# Altium PCB PCB.PcbDoc
Units mm, origin at the board's own origin, x right, y up, seen from the top; angles counter-clockwise.
Board outline 44.96 x 32.77 mm, 4 copper layers (Top Layer, Mid Layer 1, Mid Layer 2, Bottom Layer), stack 1.57 mm thick; 21 components, 14 nets, 70 pads, 19 vias.
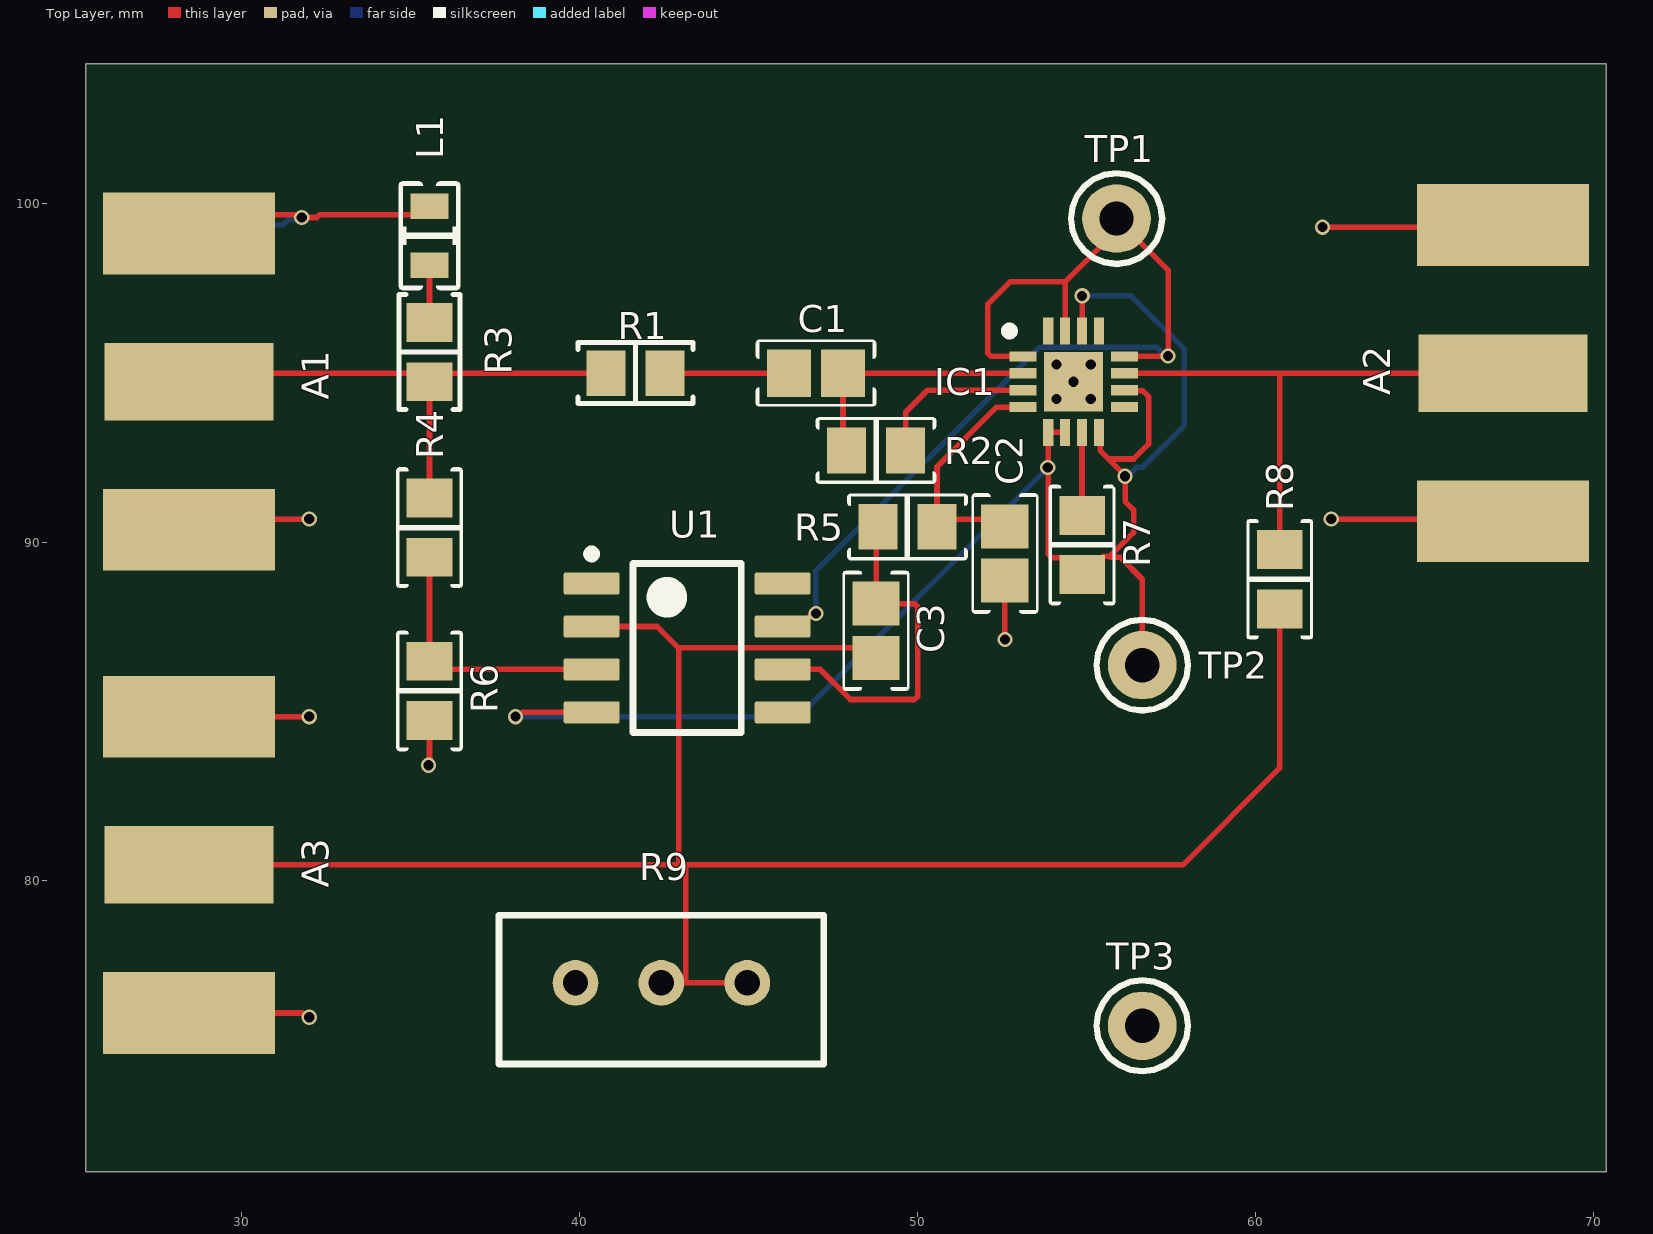
[diagram p0: Top Layer view]
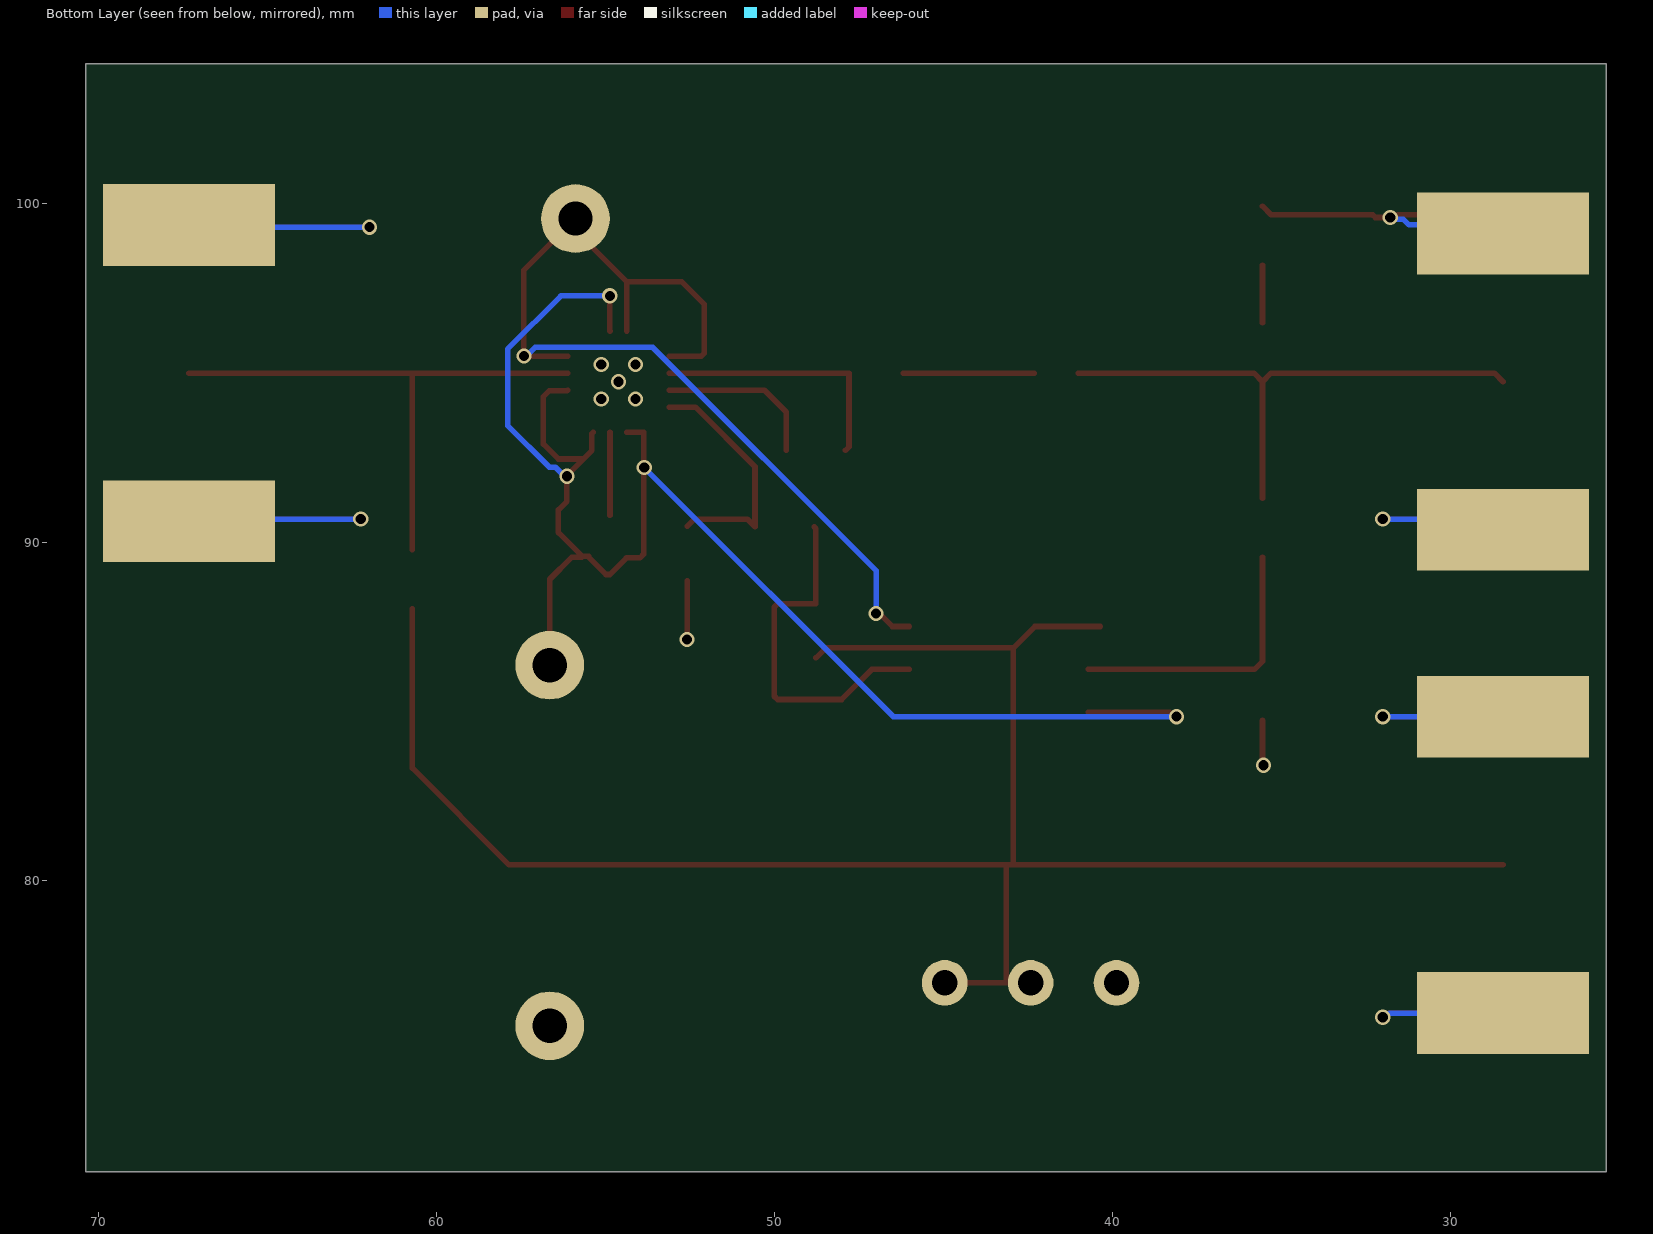
[diagram p1: Bottom Layer view, seen from below]
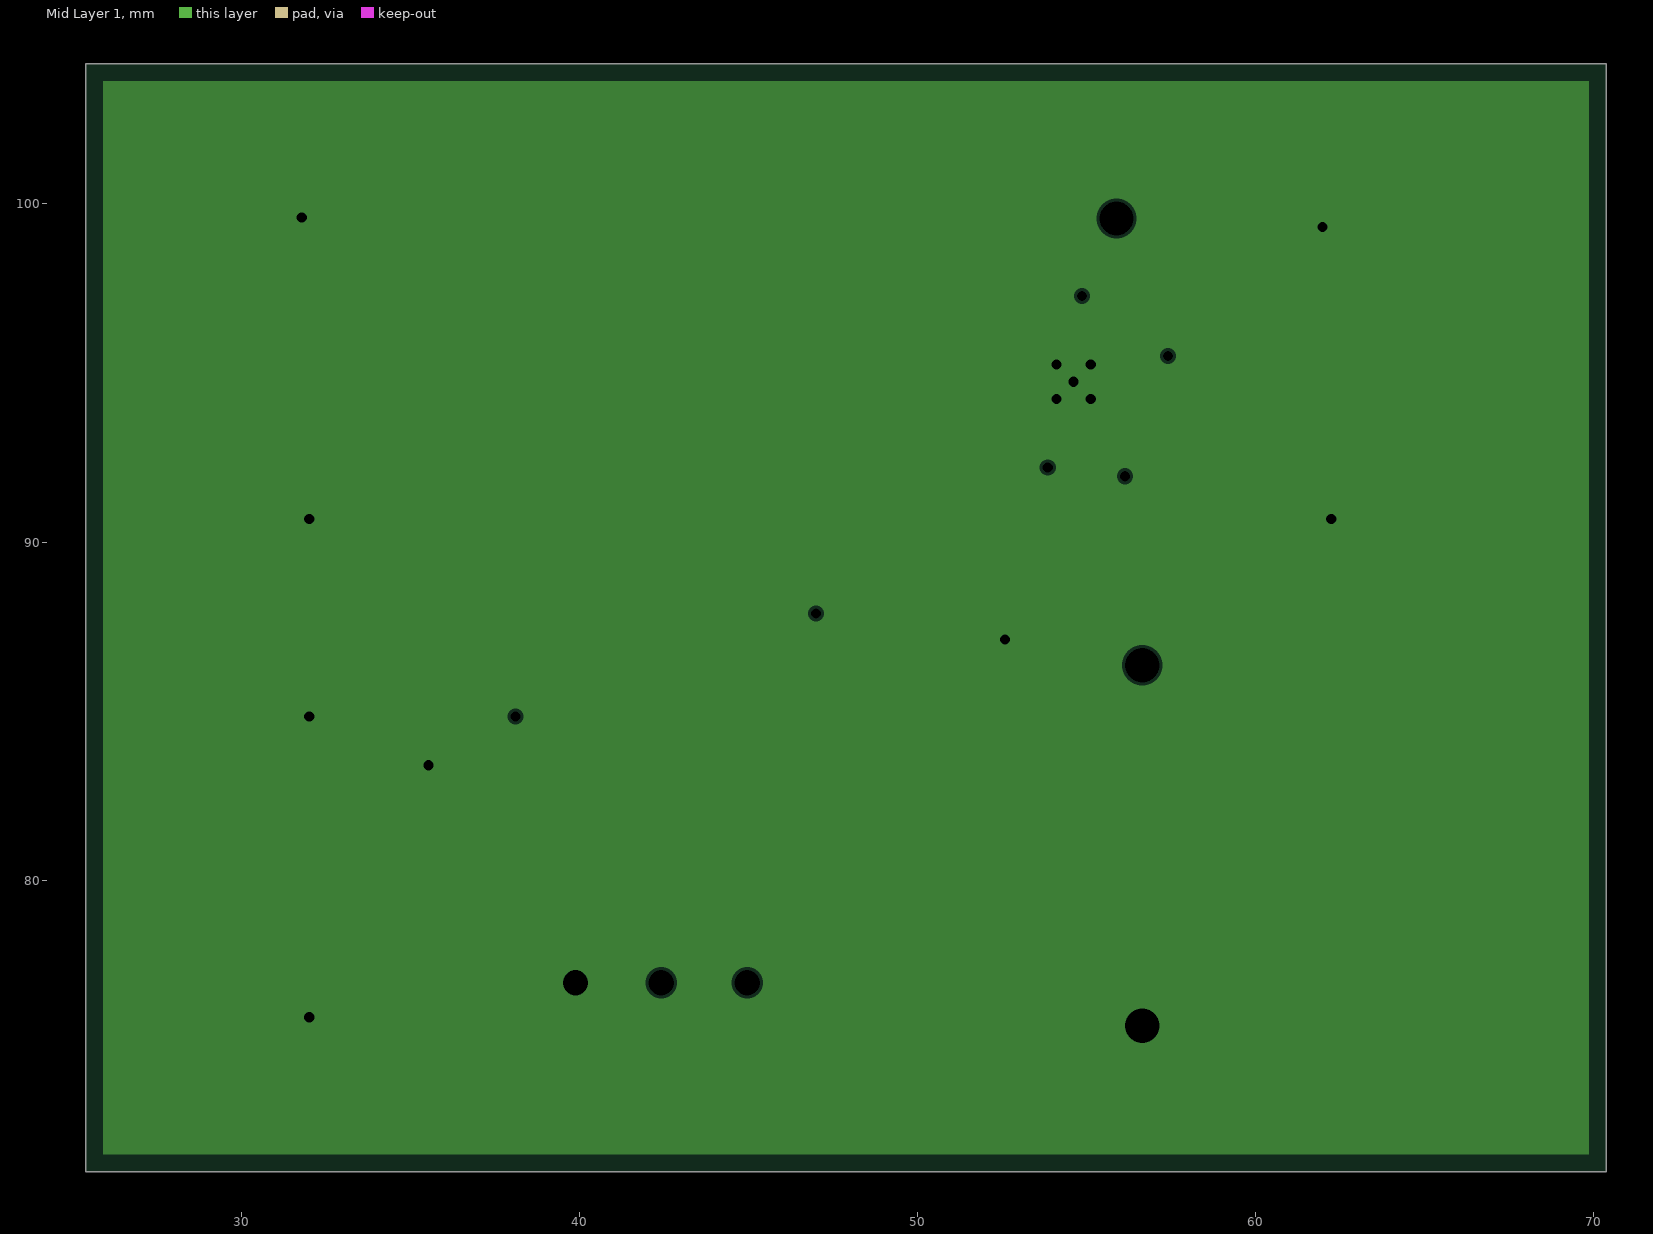
[diagram p2: Mid Layer 1, clearances drawn from the general rule]
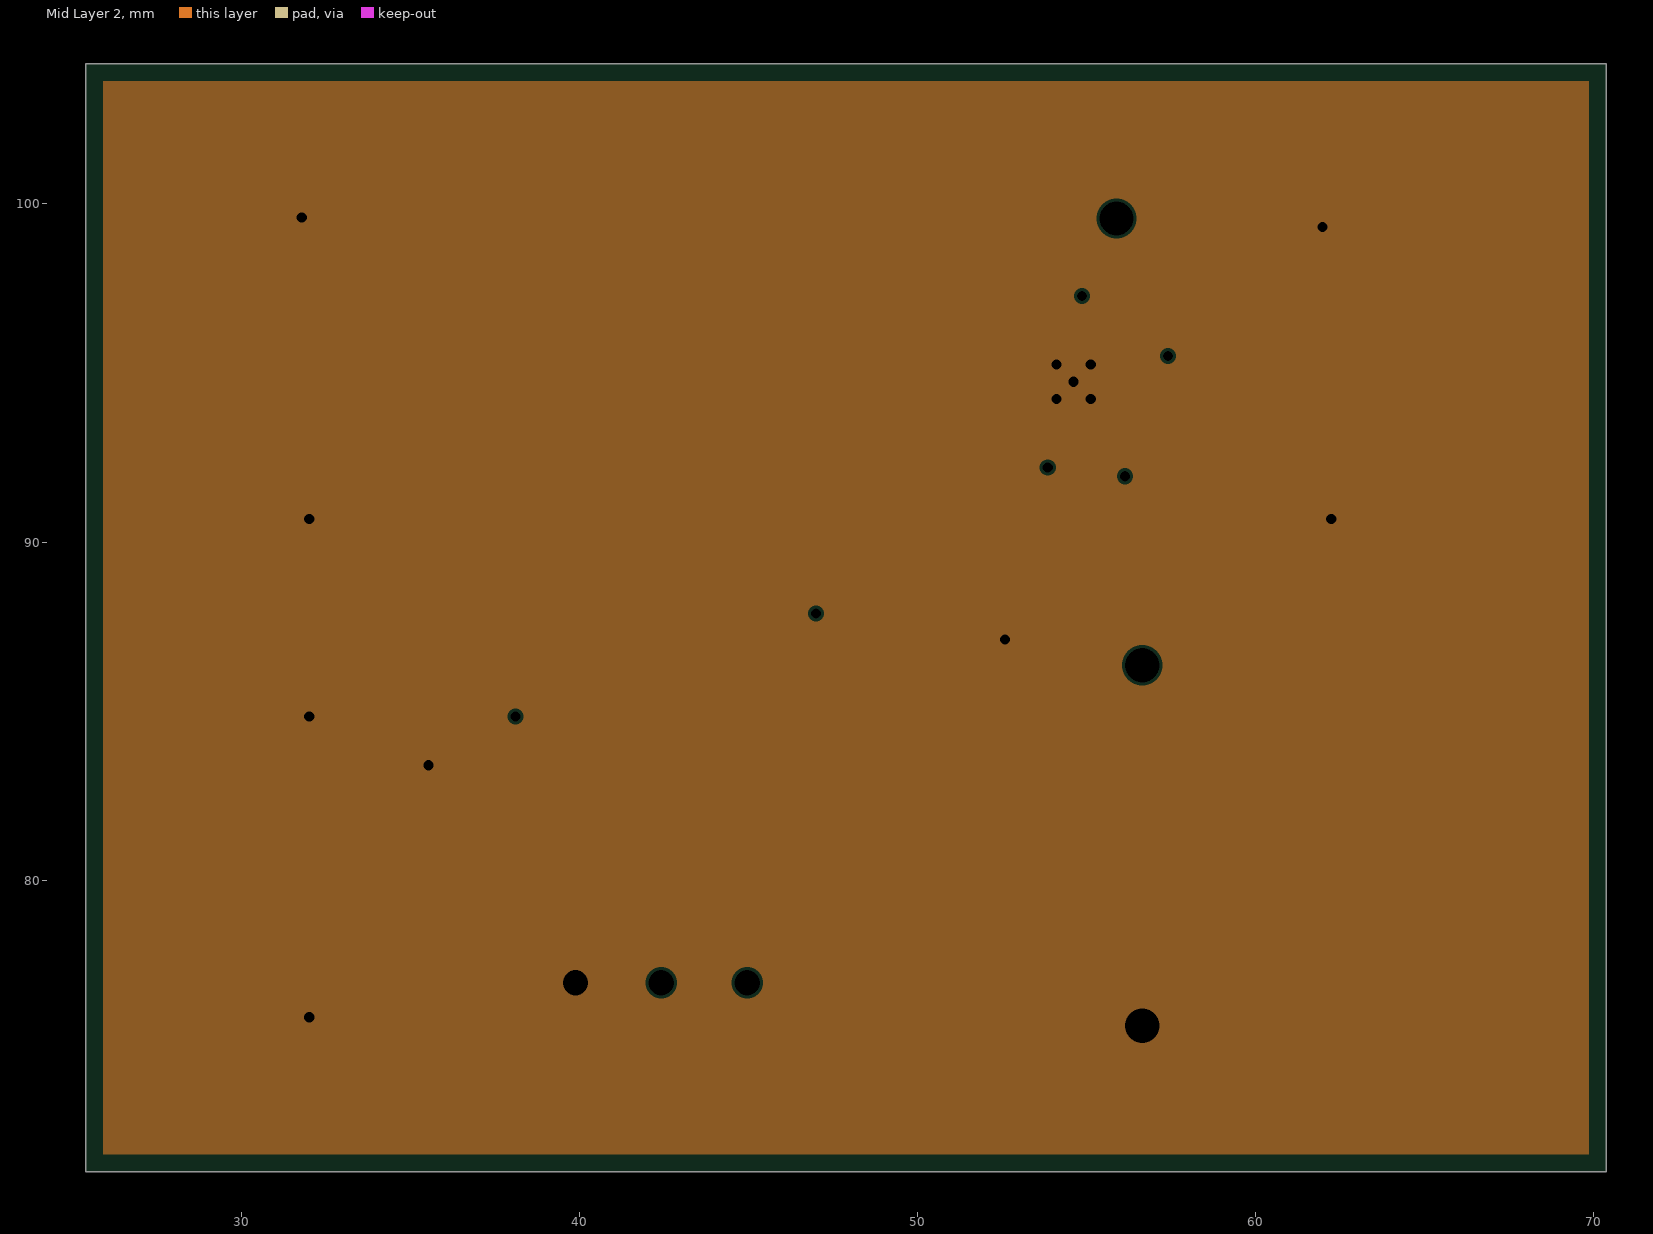
[diagram p3: Mid Layer 2, clearances drawn from the general rule]
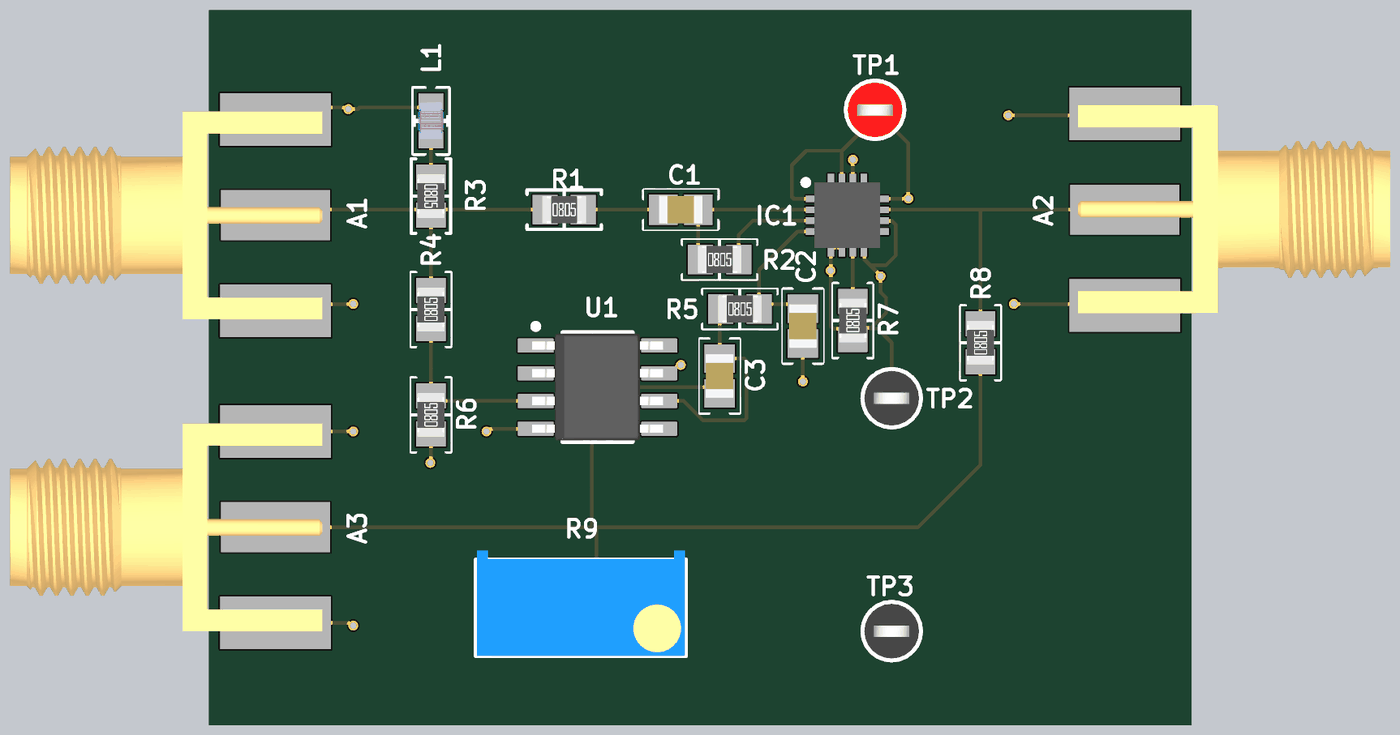
[diagram p4: 3D render of the assembled board from above, using the file's embedded part models]

## Layer stack, top to bottom
Top Solder: solder mask 0.0127, Solder Resist, Dk 3.8
Top Layer: signal copper 0.035
Dielectric 1: prepreg 0.1, 2313, Dk 4.05
Mid Layer 1: plane copper 0.0175, net GND
Core: core 1.265, FR-4, Dk 4.5
Mid Layer 2: plane copper 0.0175, net GND
Dielectric 2: prepreg 0.1, 2313, Dk 4.05
Bottom Layer: signal copper 0.035
Bottom Solder: solder mask 0.0127, Solder Resist, Dk 3.8

## Board outline
25.4,71.374 70.358,71.374 70.358,104.14 25.4,104.14

## Design rules (kind name [scope] priority, off if disabled: settings)
BoardOutlineClearance [All] p1: gap=0.2 ignorepadtopadclearanceinfootprint=FALSE
Clearance [All] p1: gap=0.089 ignorepadtopadclearanceinfootprint=FALSE except(0.127: Arc-Via Track-Via SMDPad-Via THPad-Via Via-Via Via-Fill Via-Poly Via-Region Via-Text; 0.25: Arc-Hole Track-Hole SMDPad-Hole THPad-Hole Via-Hole Fill-Hole Poly-Hole Region-Hole Text-Hole)
ComponentClearance [All] p1: gap=0.089 collisioncheckmode=3 verticalgap=0.089 showdistances=TRUE
DiffPairsRouting [All] p1: maxlimit=0.089 minlimit=0.089 mostfreqgap=0.089 toplayer_minwidth=0.089 toplayer_maxwidth=1816.048 toplayer_prefwidth=0.089 bottomlayer_minwidth=0.089 bottomlayer_maxwidth=1816.048 bottomlayer_prefwidth=0.089 maxuncoupledlength=12.7
Height [All] p1: minheight=0 maxheight=1816.048 prefheight=12.7
HoleSize [All] p1: absolutevalues=TRUE maxlimit=6.3 minlimit=0.2 maxpercent=80.000 minpercent=20.000
HoleToHoleClearance [All] p1: gap=0.25 allowstackedmicrovias=FALSE
MinimumAnnularRing [All] p1: minimumring=0.074
MinimumSolderMaskSliver [All] p1: minsoldermaskwidth=0
PlaneClearance [All] p1: clearance=0.089
PlaneConnect PlaneConnectPowerPads [InPadClass('PowerPads')] p1: planeconnectstyle=Direct reliefexpansion=0.508 reliefentries=4 reliefconductorwidth=0.254 reliefairgap=0.254
PlaneConnect [All] p2: pad.planeconnectstyle=Relief pad.reliefexpansion=0.3 pad.reliefentries=4 pad.reliefconductorwidth=0.089 pad.reliefairgap=0.089 via.planeconnectstyle=Direct via.reliefexpansion=0.3 via.reliefentries=4 via.reliefconductorwidth=0.127 via.reliefairgap=0.127
PolygonConnect PolygonConnectPowerPads [All vs (InPadClass('PowerPads'))] p1: connectstyle=Direct reliefconductorwidth=0.254 reliefentries=4 polygonreliefangle="90 Angle" airgapwidth=0.254
PolygonConnect [All] p2: thpad.connectstyle=Relief thpad.reliefconductorwidth=0.089 thpad.reliefentries=4 thpad.polygonreliefangle="90 Angle" thpad.airgapwidth=0.089 smdpad.connectstyle=Relief smdpad.reliefconductorwidth=0.089 smdpad.reliefentries=4 smdpad.polygonreliefangle="90 Angle" smdpad.airgapwidth=0.089 via.connectstyle=Direct via.reliefconductorwidth=0.127 via.reliefentries=4 via.polygonreliefangle="90 Angle" via.airgapwidth=0.127
RoutingVias [All] p1: holewidth=0.2 width=0.45 viastyle="Through Hole" minholewidth=0.2 minwidth=0.45 maxholewidth=6.3 maxwidth=6.55
SilkToSilkClearance [All] p1: silktosilkclearance=0
SilkToSolderMaskClearance [IsPad] p1: minsilkscreentomaskgap=0.089 clearancetoexposedcopper=TRUE
SolderMaskExpansion [All] p1: expansion=0.075 istentingtop=FALSE
Width [All] p1: maxlimit=1816.048 minlimit=0.089 preferedwidth=0.089
20 further rules are at their usual default settings.

## Components (designator, comment, footprint, x,y, rotation, side; value= is the part's Value field where it differs from the comment)
A1 "0732511150" "MOLEX SD-73251-115" 25.448,94.742 r180 top
A2 "0732511150" "MOLEX SD-73251-115" 70.31,94.996 r0 top
A3 "0732511150" "MOLEX SD-73251-115" 25.448,80.453 r180 top
C1 "330 pF" "CAP 0805_2012" 46.99,94.996 r0 top
C2 "100 pF" "CAP 0805_2012" 52.578,89.662 r90 top
C3 "56 pF" "CAP 0805_2012" 48.768,87.376 r90 top
IC1 "BUF802IRGTR" QFN50P300X300X100-17N-D 54.61,94.742 r0 top
L1 "6.8nH" "IND 0603_1608 RF WW" 35.56,99.06 r270 top
R1 "30 Ohms" "RES 0805_2012" 41.656,94.996 r0 top
R2 "10 MOhms" "RES 0805_2012" 48.768,92.71 r0 top
R3 "51 Ohms" "RES 0805_2012" 35.56,95.617 r270 top
R4 "825 kOhms" "RES 0805_2012" 35.56,90.424 r90 top
R5 "2 kOhms" "RES 0805_2012" 49.696,90.449 r0 top
R6 "200 kOhms" "RES 0805_2012" 35.56,85.598 r90 top
R7 "17.8 kOhms" "RES 0805_2012" 54.864,89.916 r90 top
R8 "80.6 kOhms" "RES 0805_2012" 60.706,88.9 r90 top
R9 "250 kOhms" "BOURNS TRIMPOT 3296W" 42.418,76.962 r0 top
TP1 "5000" Keystone5000 55.88,99.568 r90 top
TP2 "5001" Keystone5001 56.642,86.36 r90 top
TP3 "5001" Keystone5001 56.642,75.692 r90 top
U1 "OPA140AID" D0008A_M 43.18,86.868 r0 top

## Footprints (in the part's own frame and the unit in brackets; to place one, negate y for a bottom-side part, rotate by r counter-clockwise, add the part's x,y. Pads: shape width x height; smd on the part's side, far side on the other; paste and mask are expansions set on the pad)
"BOURNS TRIMPOT 3296W" [mm] "3296 - 3/8 ? Square Trimpot® Trimming Potentiometer"
  round 1.35 hole 0.75: 1(-2.54,0) 2(0,0) 3(2.54,0)
  silkscreen extent -4.8,-2.4 4.8,2, body extent -4.76,-2.41 4.76,2.41, height 11.56
"CAP 0805_2012" [mm] "Chip Capacitor, 2-Leads, Body 2.00x1.20mm, IPC Medium Density"
  rect 1.3x1.4 smd: 1(-0.8,0) 2(0.8,0)
  silkscreen extent -1.78,-0.98 1.78,0.98, body extent -1,-0.64 1,0.64, height 1.26
D0008A_M [mm] "SOIC, 8-Leads, Body 5x4mm, Pitch 1.27mm, IPC Low Density"
  rrect15% 1.65x0.65 smd: 1(-2.825,1.905) 2(-2.825,0.635) 3(-2.825,-0.635) 4(-2.825,-1.905) 5(2.825,-1.905) 6(2.825,-0.635) 7(2.825,0.635) 8(2.825,1.905)
  silkscreen extent -2.95,-2.5 1.6,2.9, body extent -3,-2.45 3,2.45, height 1.63
"IND 0603_1608 RF WW" [mm] "Chip Inductor, 2-Leads, Body 1.65x0.99mm, IPC Medium Density"
  rect 0.76x1.13 smd: 1(-0.875,0) 2(0.875,0)
  silkscreen extent -1.61,-0.91 1.61,0.91, body extent -0.84,-0.58 0.83,0.58, height 1
Keystone5000 [mil]
  round 80 hole 40: 1(0,0)
  silkscreen extent -56,-56 56,56, body extent -49,-49 49,49, height 182
Keystone5001 [mil]
  round 80 hole 40: 1(0,0)
  silkscreen extent -56,-56 56,56, body extent -49,-49 49,49, height 182
"MOLEX SD-73251-115" [mm]
  rect 5.08x2.415 smd: G(-3,4.383) G(-3,-4.383)
  rect 5.08x2.415 smd far side: G(-3,4.383) G(-3,-4.383)
  rect 5x2.29 smd: S(-3,0)
  body extent -5.14,-4.75 9.14,4.78, height 4.36
QFN50P300X300X100-17N-D [mm]
  rect 0.8x0.3 smd: 1(-1.5,0.75) 2(-1.5,0.25) 3(-1.5,-0.25) 4(-1.5,-0.75) 9(1.5,-0.75) 10(1.5,-0.25) 11(1.5,0.25) 12(1.5,0.75)
  rect 0.3x0.8 smd: 5(-0.75,-1.5) 6(-0.25,-1.5) 7(0.25,-1.5) 8(0.75,-1.5) 13(0.75,1.5) 14(0.25,1.5) 15(-0.25,1.5) 16(-0.75,1.5)
  rect 1.75x1.75 smd: 17(0,0)
  silkscreen extent -2.02,1.38 -1.77,1.62, body extent -1.5,-1.5 1.5,1.5, height 1
"RES 0805_2012" [mm] "Chip Resistor, 2-Leads, Body 2.00x1.25mm, IPC Medium Density"
  rect 1.15x1.35 smd: 1(-0.875,0) 2(0.875,0)
  silkscreen extent -1.7,-0.9 1.7,0.9, body extent -1,-0.62 1,0.63, height 0.6

## Part data
A1 A2 A3: "CONN SMA RCPT STR 50OHM EDGE MNT", Frequency - Max="18 GHz", Housing Color=Gold, manufacturer=Molex, Supplier Part Number 1=WM5534-ND, componentlink1description=Datasheet, componentlink1url=https://www.molex.com/pdm_docs/ps/PS-89675-346.pdf, componentlink2description="DigiKey Link", componentlink2url=https://www.digikey.com/en/products/detail/molex/0732511150/1465156, Connector Style=SMA, Connector Type="Receptacle, Female Socket", Contact Termination=Solder, Fastening Type=Threaded, Impedance=50Ohm, lastupdated="29-6-2022 18:06:18", Lifecycle Status=Active, Minimum Order=1, Mounting Type="Board Edge, End Launch", Number of Ports=1, packaging=Tray, Part Number=0732511150, Part Status=Active, price=2.16, series=73251, Shield Termination=Solder, Supplier 1=DigiKey
C1: library part 0805N331K501NT, "CAP CER 330PF 500V C0G/NP0 0805", Device Package="0805 (2012 Metric)", manufacturer="Knowles Novacap", Operating Temperature="-55°C ~ 125°C", Supplier Part Number 1=1763-1199-1-ND, Temperature Coefficient="C0G, NP0", Tolerance=±10%, Voltage - Rated=500V, Applications="General Purpose", Capacitance="330 pF", componentlink1description=Datasheet, componentlink1url=https://www.knowlescapacitors.com/getattachment/f044c413-e6db-482e-8245-bb630384b177/Hi-Rel-C0G.aspx, componentlink2description="DigiKey Link", componentlink2url=https://www.digikey.com/en/products/detail/knowles-novacap/0805N331K501NT/7246439, lastupdated="28-4-2023 19:11:32", Lifecycle Status=Active, Minimum Order=1, Mounting Type="Surface Mount, MLCC", Package / Case="0805 (2012 Metric)", packaging=TapeAndReel, Part Number=0805N331K501NT, Part Status=Active, partid=14472, price=0.09, series=-, Size / Dimension="0.080\" L x 0.050\" W (2.03mm x 1.27mm)", Supplier 1=DigiKey, Thickness (Max)="0.054\" (1.37mm)"
C2: library part 501R15N101KV4T, "CAP CER 100PF 500V C0G/NP0 0805", Device Package="0805 (2012 Metric)", manufacturer="Johanson Dielectrics Inc.", Operating Temperature="-55°C ~ 125°C", Supplier Part Number 1=709-1019-1-ND, Temperature Coefficient="C0G, NP0", Tolerance=±10%, Voltage - Rated=500V, Applications="General Purpose", Capacitance="100 pF", componentlink1description=Datasheet, componentlink1url=//media.digikey.com/pdf/Data%20Sheets/Johanson%20Dielectrics/High_Voltage_MLCC.pdf, componentlink2description="DigiKey Link", componentlink2url=https://www.digikey.com/en/products/detail/johanson-dielectrics-inc/501R15N101KV4T/1556341, Features="High Voltage", lastupdated="28-4-2023 19:11:22", Lifecycle Status=Active, Minimum Order=1, Mounting Type="Surface Mount, MLCC", Package / Case="0805 (2012 Metric)", packaging=TapeAndReel, Part Number=501R15N101KV4T, Part Status=Active, partid=17109, price=0.03, series=-, Size / Dimension="0.080\" L x 0.050\" W (2.03mm x 1.27mm)", Supplier 1=DigiKey, Thickness (Max)="0.055\" (1.40mm)"
C3: library part 251R15S560GV4E, "CAP CER 56PF 250V NP0 0805", Device Package="0805 (2012 Metric)", manufacturer="Johanson Technology Inc.", Operating Temperature="-55°C ~ 125°C", Supplier Part Number 1=712-1747-1-ND, Temperature Coefficient="C0G, NP0", Tolerance=±2%, Voltage - Rated=250V, Applications="RF, Microwave, High Frequency", Capacitance="56 pF", componentlink1description=Datasheet, componentlink1url=https://www.johansontechnology.com/downloads/catalog/johanson-technology-multi-layer-high-q-capacitors.pdf, componentlink2description="DigiKey Link", componentlink2url=https://www.digikey.com/en/products/detail/johanson-technology-inc/251R15S560GV4E/1919542, Features="High Q, Low Loss, Ultra Low ESR", lastupdated="28-4-2023 19:11:18", Lifecycle Status=Active, Minimum Order=1, Mounting Type="Surface Mount, MLCC", Package / Case="0805 (2012 Metric)", packaging=TapeAndReel, Part Number=251R15S560GV4E, Part Status=Active, partid=18415, price=0.15, series=S, Size / Dimension="0.080\" L x 0.050\" W (2.03mm x 1.27mm)", Supplier 1=DigiKey, Thickness (Max)="0.046\" (1.17mm)"
IC1: "Integrated Circuit", Manufacturer_Name="Texas Instruments", Mouser Part Number=595-BUF802IRGTR, Datasheet Link=https://www.ti.com/lit/ds/symlink/buf802.pdf?ts=1646208046294&ref_url=https%253A%252F%252Fwww.ti.com%252Fstore%252Fti%252Fen%252Fp%252Fproduct%252F%253Fp%253DBUF802IRGTR%2526keyMatch%253DBUF802IRGTR, Height=1mm, Manufacturer_Part_Number=BUF802IRGTR, Mouser Price/Stock=https://www.mouser.co.uk/ProductDetail/Texas-Instruments/BUF802IRGTR?qs=doiCPypUmgEiF30IF7I3XQ%3D%3D
L1: library part 744917068, "FIXED IND 6.8NH 1.4A 42 MOHM SMD", Current Rating (Amps)=1.4A, DC Resistance (DCR)="42mOhm Max", Device Package="0603 (1608 Metric)", Frequency - Self Resonant=5.8GHz, Inductance Frequency - Test=250MHz, manufacturer="Würth Elektronik", Operating Temperature="-40°C ~ 125°C", Q @ Freq="34 @ 250MHz", Supplier Part Number 1=732-11263-1-ND, Tolerance=±2%, componentlink1description=Datasheet, componentlink1url=https://katalog.we-online.de/pbs/datasheet/744917068.pdf, componentlink2description="DigiKey Link", componentlink2url=http://digikey.com/product-detail/en/w-rth-elektronik/744917068/732-11263-1-ND/6833722, Height - Seated (Max)="0.044\" (1.11mm)", Inductance=6.8nH, lastupdated="6-9-2020 11:05:16", Lifecycle Status=Active, Material - Core=Ceramic, Minimum Order=0, Mounting Type="Surface Mount", Package / Case="0603 (1608 Metric)", packaging=TapeAndReel, Part Number=744917068, Part Status=Active, partid=808, price=0.46, series="WE-KI HC", Shielding=Unshielded, Size / Dimension="0.067\" L x 0.043\" W (1.70mm x 1.10mm)", Supplier 1=DigiKey, Supplier Device Package="0603 (1608 Metric)", Type=Wirewound
R1: library part AC0805FR-0730RL, "RES SMD 30 OHM 1% 1/8W 0805", Device Package="0805 (2012 Metric)", manufacturer=Yageo, Operating Temperature="-55°C ~ 155°C", Power (Watts)="0.125W, 1/8W", Ratings=AEC-Q200, Supplier Device Package=0805, Supplier Part Number 1=YAG3722CT-ND, Temperature Coefficient=±100ppm/°C, Tolerance=±1%, componentlink1description=Datasheet, componentlink1url=https://www.yageo.com/upload/media/product/productsearch/datasheet/rchip/PYu-AC_51_RoHS_L_7.pdf, componentlink2description="DigiKey Link", componentlink2url=https://www.digikey.com/en/products/detail/yageo/AC0805FR-0730RL/5896763, Composition="Thick Film", Features="Automotive AEC-Q200, Moisture Resistant", Height - Seated (Max)="0.024\" (0.60mm)", lastupdated="29-4-2023 19:50:29", Lifecycle Status=Active, Minimum Order=1, Number of Terminations=2, Package / Case="0805 (2012 Metric)", packaging=TapeAndReel, Part Number=AC0805FR-0730RL, Part Status=Active, partid=49539, price=0.01, Resistance="30 Ohms", series=AC, Size / Dimension="0.079\" L x 0.049\" W (2.00mm x 1.25mm)", Supplier 1=DigiKey
R2: library part ERJ-6GEYJ106V, "RES SMD 10M OHM 5% 1/8W 0805", Device Package="0805 (2012 Metric)", manufacturer="Panasonic Electronic Components", Operating Temperature="-55°C ~ 155°C", Power (Watts)="0.125W, 1/8W", Ratings=AEC-Q200, Supplier Device Package=0805, Supplier Part Number 1=P10MACT-ND, Temperature Coefficient="-400/ +150ppm/°C", Tolerance=±5%, componentlink1description=Datasheet, componentlink1url=http://industrial.panasonic.com/www-cgi/jvcr13pz.cgi?E+PZ+3+AOA0001+ERJ6GEYJ106V+7+WW, componentlink2description="DigiKey Link", componentlink2url=https://www.digikey.com/en/products/detail/panasonic-electronic-components/ERJ-6GEYJ106V/282189, Composition="Thick Film", Features="Automotive AEC-Q200", Height - Seated (Max)="0.028\" (0.70mm)", lastupdated="28-4-2023 19:41:19", Lifecycle Status=Active, Minimum Order=1, Number of Terminations=2, Package / Case="0805 (2012 Metric)", packaging=TapeAndReel, Part Number=ERJ-6GEYJ106V, Part Status=Active, partid=47715, price=0.01, Resistance="10 MOhms", series=ERJ-6G, Size / Dimension="0.079\" L x 0.049\" W (2.00mm x 1.25mm)", Supplier 1=DigiKey
R3: library part CR0805-FX-51R0ELF, "RES SMD 51 OHM 1% 1/8W 0805", Device Package="0805 (2012 Metric)", manufacturer="Bourns Inc.", Operating Temperature="-55°C ~ 155°C", Power (Watts)="0.125W, 1/8W", Supplier Device Package=0805, Supplier Part Number 1=118-CR0805-FX-51R0ELFCT-ND, Temperature Coefficient=±100ppm/°C, Tolerance=±1%, componentlink1description=Datasheet, componentlink1url=https://www.bourns.com/docs/Product-Datasheets/CHPREZTR.pdf, componentlink2description="DigiKey Link", componentlink2url=https://www.digikey.com/en/products/detail/bourns-inc/CR0805-FX-51R0ELF/3785003, Composition="Thick Film", Features="Moisture Resistant", Height - Seated (Max)="0.024\" (0.60mm)", lastupdated="29-4-2023 19:51:57", Lifecycle Status=Active, Minimum Order=1, Number of Terminations=2, Package / Case="0805 (2012 Metric)", packaging=CutTape, Part Number=CR0805-FX-51R0ELF, Part Status=Active, partid=32487, price=0.01, Resistance="51 Ohms", series=CR0805, Size / Dimension="0.079\" L x 0.049\" W (2.00mm x 1.25mm)", Supplier 1=DigiKey
R4: library part ERA-6AEB8253V, "RES 825K OHM 0.1% 1/8W 0805", Device Package="0805 (2012 Metric)", manufacturer="Panasonic Electronic Components", Operating Temperature="-55°C ~ 155°C", Power (Watts)="0.125W, 1/8W", Ratings=AEC-Q200, Supplier Device Package=0805, Supplier Part Number 1=P825KDACT-ND, Temperature Coefficient=±25ppm/°C, Tolerance=±0.1%, componentlink1description=Datasheet, componentlink1url=https://industrial.panasonic.com/cdbs/www-data/pdf/RDM0000/AOA0000C307.pdf, componentlink2description="DigiKey Link", componentlink2url=https://www.digikey.com/en/products/detail/panasonic-electronic-components/ERA-6AEB8253V/2025926, Composition="Thin Film", Features="Automotive AEC-Q200", Height - Seated (Max)="0.024\" (0.60mm)", lastupdated="28-4-2023 19:41:42", Lifecycle Status=Active, Minimum Order=1, Number of Terminations=2, Package / Case="0805 (2012 Metric)", packaging=TapeAndReel, Part Number=ERA-6AEB8253V, Part Status=Active, partid=43407, price=0.03, Resistance="825 kOhms", series=ERA-6A, Size / Dimension="0.079\" L x 0.049\" W (2.00mm x 1.25mm)", Supplier 1=DigiKey
R5: library part ERA-6AEB202V, "RES 2K OHM 0.1% 1/8W 0805", Device Package="0805 (2012 Metric)", manufacturer="Panasonic Electronic Components", Operating Temperature="-55°C ~ 155°C", Power (Watts)="0.125W, 1/8W", Ratings=AEC-Q200, Supplier Device Package=0805, Supplier Part Number 1=P2.0KDACT-ND, Temperature Coefficient=±25ppm/°C, Tolerance=±0.1%, componentlink1description=Datasheet, componentlink1url=https://industrial.panasonic.com/cdbs/www-data/pdf/RDM0000/AOA0000C307.pdf, componentlink2description="DigiKey Link", componentlink2url=https://www.digikey.com/en/products/detail/panasonic-electronic-components/ERA-6AEB202V/1465756, Composition="Thin Film", Features="Automotive AEC-Q200", Height - Seated (Max)="0.024\" (0.60mm)", lastupdated="28-4-2023 19:42:36", Lifecycle Status=Active, Minimum Order=1, Number of Terminations=2, Package / Case="0805 (2012 Metric)", packaging=TapeAndReel, Part Number=ERA-6AEB202V, Part Status=Active, partid=28084, price=0.03, Resistance="2 kOhms", series=ERA-6A, Size / Dimension="0.079\" L x 0.049\" W (2.00mm x 1.25mm)", Supplier 1=DigiKey
R6: library part ERA-6AEB204V, "RES 200K OHM 0.1% 1/8W 0805", Device Package="0805 (2012 Metric)", manufacturer="Panasonic Electronic Components", Operating Temperature="-55°C ~ 155°C", Power (Watts)="0.125W, 1/8W", Ratings=AEC-Q200, Supplier Device Package=0805, Supplier Part Number 1=P200KDACT-ND, Temperature Coefficient=±25ppm/°C, Tolerance=±0.1%, componentlink1description=Datasheet, componentlink1url=https://industrial.panasonic.com/cdbs/www-data/pdf/RDM0000/AOA0000C307.pdf, componentlink2description="DigiKey Link", componentlink2url=https://www.digikey.com/en/products/detail/panasonic-electronic-components/ERA-6AEB204V/1465804, Composition="Thin Film", Features="Automotive AEC-Q200", Height - Seated (Max)="0.024\" (0.60mm)", lastupdated="28-4-2023 19:42:36", Lifecycle Status=Active, Minimum Order=1, Number of Terminations=2, Package / Case="0805 (2012 Metric)", packaging=TapeAndReel, Part Number=ERA-6AEB204V, Part Status=Active, partid=28091, price=0.03, Resistance="200 kOhms", series=ERA-6A, Size / Dimension="0.079\" L x 0.049\" W (2.00mm x 1.25mm)", Supplier 1=DigiKey
R7: library part ERJ-PB6B1782V, "RES SMD 17.8K OHM 0.1% 1/4W 0805", Device Package="0805 (2012 Metric)", manufacturer="Panasonic Electronic Components", Operating Temperature="-55°C ~ 155°C", Power (Watts)="0.25W, 1/4W", Ratings=AEC-Q200, Supplier Device Package=0805, Supplier Part Number 1=P20734CT-ND, Temperature Coefficient=±50ppm/°C, Tolerance=±0.1%, componentlink1description=Datasheet, componentlink1url=https://industrial.panasonic.com/cdbs/www-data/pdf/RDM0000/AOA0000C328.pdf, componentlink2description="DigiKey Link", componentlink2url=https://www.digikey.com/en/products/detail/panasonic-electronic-components/ERJ-PB6B1782V/6213517, Composition="Thick Film", Features="Automotive AEC-Q200, Pulse Withstanding", Height - Seated (Max)="0.028\" (0.70mm)", lastupdated="28-4-2023 19:41:43", Lifecycle Status=Active, Minimum Order=1, Number of Terminations=2, Package / Case="0805 (2012 Metric)", packaging=TapeAndReel, Part Number=ERJ-PB6B1782V, Part Status=Active, partid=43282, price=0.04, Resistance="17.8 kOhms", series=ERJ-PB6, Size / Dimension="0.079\" L x 0.049\" W (2.00mm x 1.25mm)", Supplier 1=DigiKey
R8: library part ERA-6AEB8062V, "RES 80.6K OHM 0.1% 1/8W 0805", Device Package="0805 (2012 Metric)", manufacturer="Panasonic Electronic Components", Operating Temperature="-55°C ~ 155°C", Power (Watts)="0.125W, 1/8W", Ratings=AEC-Q200, Supplier Device Package=0805, Supplier Part Number 1=P80.6KDACT-ND, Temperature Coefficient=±25ppm/°C, Tolerance=±0.1%, componentlink1description=Datasheet, componentlink1url=https://industrial.panasonic.com/cdbs/www-data/pdf/RDM0000/AOA0000C307.pdf, componentlink2description="DigiKey Link", componentlink2url=https://www.digikey.com/en/products/detail/panasonic-electronic-components/ERA-6AEB8062V/2025835, Composition="Thin Film", Features="Automotive AEC-Q200", Height - Seated (Max)="0.024\" (0.60mm)", lastupdated="28-4-2023 19:42:36", Lifecycle Status=Active, Minimum Order=1, Number of Terminations=2, Package / Case="0805 (2012 Metric)", packaging=TapeAndReel, Part Number=ERA-6AEB8062V, Part Status=Active, partid=28140, price=0.04, Resistance="80.6 kOhms", series=ERA-6A, Size / Dimension="0.079\" L x 0.049\" W (2.00mm x 1.25mm)", Supplier 1=DigiKey
R9: library part 3296W-1-254LF, "TRIMMER 250K OHM 0.5W PC PIN TOP", manufacturer="Bourns Inc.", Power (Watts)="0.5W, 1/2W", Resistive Material=Cermet, Supplier Part Number 1=3296W-254LF-ND, Temperature Coefficient=±100ppm/°C, Tolerance=±10%, Adjustment Type="Top Adjustment", componentlink1description=Datasheet, componentlink1url=https://www.bourns.com/docs/Product-Datasheets/3296.pdf, componentlink2description="DigiKey Link", componentlink2url=https://www.digikey.com/en/products/detail/bourns-inc/3296W-1-254LF/1088055, lastupdated="16-3-2023 20:10:45", Lifecycle Status=Active, Minimum Order=1, Mounting Type="Through Hole", Number of Turns=25, packaging=Tube, Part Number=3296W-1-254LF, Part Status=Active, partid=238, price=1.35, Resistance="250 kOhms", series="Trimpot® 3296 - Sealed", Size / Dimension="Rectangular - 0.375\" x 0.190\" Face (9.53mm x 4.83mm)", Supplier 1=DigiKey, Termination Style="PC Pins"
TP1: "Test Point, Miniature, Red, TH", Color=Red, manufacturer=Keystone, Supplier Part Number 1=36-5000-ND, componentlink1description="Datasheet URL", componentlink1url=http://www.keyelco.com/userAssets/file/M60-2p60.pdf, CompType="Test Point Loop", ContactFinish=Silver, LatestRevisionDate=2017-01-19, MountType=TH, PackageReference="Red Miniature Testpoint", PartNumber=5000, Publisher="Texas Instruments", RoHS=Y, Supplier 1=Digi-Key, Supplier 2=Mouser, Supplier Part Number 2=534-5000, SymbolVersion=2008-04-04
TP2 TP3: "Test Point, Miniature, Black, TH", Color=Black, manufacturer=Keystone, Supplier Part Number 1=36-5001-ND, componentlink1description="Datasheet URL", componentlink1url=http://www.keyelco.com/userAssets/file/M60-2p60.pdf, CompType="Test Point Loop", ContactFinish=Silver, Green_EU RoHS=Passed, Green_EU RoHS-2=Incomplete, Green_Lifecycle=Active, Green_REACh=Passed, LatestRevisionDate=2017-05-11, MountType=TH, PackageReference="Black Miniature Testpoint", PartNumber=5001, Publisher="Texas Instruments", RoHS=Y, Supplier 1=Digi-Key, Supplier 2=Mouser, Supplier Part Number 2=534-5001, SymbolVersion=2008-04-04
U1: library part CMP-0271-00131-3, "11 MHz, Single Supply, Low Noise, Precision, Rail-to-Rail Output, JFET Amplifier, 4.5 to 36 V, -40 to 125 degC, 8-pin SOIC (D8), Green (RoHS & no Sb/Br)", manufacturer="Texas Instruments", Rating=Catalog, Total Supply Voltage(Max)(+5V is 5, +/-5V is 10)=36, Total Supply Voltage(Min)(+5V is 5, +/-5V is 10)=4.5, CMRR(Min)(dB)=126, Code_JEDEC=MS-012, componentlink1description="Manufacturer URL", componentlink1url=http://www.ti.com/, componentlink2description=Datasheet, componentlink2url=http://www.ti.com/lit/ds/symlink/opa140.pdf, ComponentLink3Description="Package Specification", ComponentLink3URL=http://www.ti.com/litv/pdf/msoi002j, DatasheetVersion=SBOS498A, Eco-Plan="Green (RoHS & no Sb/Br)", GBW(Typ)(MHz)=11, IIB(Max)(pA)=10, Iq per channel(Max)(mA)=2, Mounting Technology="Surface Mount", Number Of Channels=1, Offset Drift(Typ)(uV/C)=0.35, PackageDescription="8-Pin Plastic Small Outline, Body 4.9 x 3.9 mm, Pitch 1.27 mm", PackageReference=D0008A, PackageVersion="4040047-3/M, 06/2011", Packing=TUBE, PartNumber=OPA140AID, Slew Rate(Typ)(V/us)=20, Sub Family="High Supply Voltage Amplifier (>=30V), Low Input Bias Current Amp (<=10pA), Low Noise Amp (<=10nV/rtHz), Low Offset Voltage Amplifier (<=500uV), Precision Amplifier", Vio (25C)(Max)(mV)=0.12

## Via types
v1: diameter 0.45, hole 0.3, Top Layer to Bottom Layer, 19 vias

## Nets (pads, with @x,y where several pads share a name; then routed paths per layer and width w, separated by ;. In a path a pad name is that pad's centre, name@x,y a point inside that pad or via, vN(x,y) a via of type N, cw(c..) or ccw(c..) an arc to the next point about the centre after c; other vN are vias at no path point)
+6V: IC1.1 IC1.12 IC1.15 TP1.1 U1.7 | length 30.9
  Top Layer w0.165: U1.7 46.505,87.503 46.831,87.829 46.935,87.829 v1(46.99,87.884) ; IC1.1 52.166,95.492 52.07,95.588 52.07,97.028 52.736,97.694 54.36,97.694 ; IC1.15 54.36,97.694 ; IC1.12 56.116,95.498 57.398,95.498 v1(57.404,95.504) 57.404,98.044 56.381,99.067 56.381,99.321 56.127,99.321 TP1.1 55.88,99.214 54.36,97.694
  Bottom Layer w0.165: v1(46.99,87.884) 46.99,89.154 53.594,95.758 57.073,95.758 57.327,95.504 v1(57.404,95.504)
-6V: IC1.5 IC1.6 IC1.8 IC1.10 IC1.14 R7.1 TP2.1 U1.4 | length 48.5
  Top Layer w0.165: 38.304,84.963 U1.4@40.716,84.963 ; v1(53.848,92.202) 53.86,92.19 53.86,89.645 53.972,89.534 54.371,89.534 R7.1 54.977,89.041 R7.1@55.485,89.549 ; v1@53.86,92.31 IC1.5 IC1.6 ; IC1.14 54.862,96.244 54.862,97.28 v1(54.864,97.282) ; IC1.8 55.394,93.208 55.394,92.71 55.648,92.456 ; R7.1@55.485,89.584 55.689,89.584 56.388,90.283 56.388,90.95 56.134,91.204 56.134,91.97 55.648,92.456 ; 55.689,89.549 55.993,89.549 56.642,88.9 TP2.1 ; IC1.10 56.131,94.471 56.659,94.471 56.828,94.302 56.828,92.896 56.388,92.456 55.648,92.456
  Bottom Layer w0.165: v1(38.1,84.836) 46.482,84.836 v1(53.848,92.202) ; v1(54.864,97.282) 56.308,97.282 57.886,95.704 57.886,93.446 56.653,92.213 56.476,92.213 56.211,91.948 v1(56.134,91.948)
GND: A1.G A2.G A3.G C2.1 IC1.17 L1.1 R6.1 R9.1 TP3.1 | length 56.8
  Top Layer w0.165: A3.G@28.448,76.07 31.802,76.07 31.927,75.946 v1(32.004,75.946) ; A3.G@28.448,84.836 v1(32.004,84.836) ; A1.G@28.448,90.359 28.767,90.678 v1(32.004,90.678) ; A1.G@28.448,99.125 29.004,99.681 31.56,99.681 31.587,99.653 31.726,99.653 v1(31.781,99.599) 32.222,99.599 32.304,99.681 35.306,99.681 L1.1 ; v1(35.532,83.398) 35.56,83.426 R6.1 ; v1(52.578,87.122) C2.1 ; v1(61.976,99.314) 67.245,99.314 A2.G@67.31,99.379 ; v1(62.23,90.678) 67.245,90.678 A2.G@67.31,90.613
  Bottom Layer w0.165: A3.G@28.448,76.07 31.803,76.07 31.927,75.946 v1(32.004,75.946) ; A3.G@28.448,84.836 v1(32.004,84.836) ; A1.G@28.448,90.359 28.767,90.678 v1(32.004,90.678) ; A1.G@28.448,99.125 28.702,99.379 31.227,99.379 31.392,99.544 31.726,99.544 v1(31.781,99.599) ; v1(61.976,99.314) 67.245,99.314 A2.G@67.31,99.379 ; v1(62.23,90.678) 67.245,90.678 A2.G@67.31,90.613
  other v1: 54.102,94.234 55.118,94.234 54.61,94.742 54.102,95.25 55.118,95.25
IN: C1.2 IC1.2 R2.1 | length 7.7
  Top Layer w0.165: R2.1 47.79,92.813 C1.2 47.794,94.992 IC1.2
IN_AUX: C2.2 IC1.4 R5.2 | length 7.2
  Top Layer w0.165: C2.2 52.362,90.678 50.8,90.678 R5.2 50.571,92.227 52.336,93.992 IC1.4
IN_C: A1.S R1.1 R3.2 R4.2 | length 16.3
  Top Layer w0.165: A1.S 28.702,94.996 35.306,94.996 R3.2 ; R4.2 R3.2 ; R1.1@41.006,94.996 35.814,94.996 R3.2
INA+: R4.1 R6.2 U1.3 | length 8.3
  Top Layer w0.165: R4.1 R6.2 35.8,86.233 U1.3@40.716,86.233
INA-: A3.S C3.1 R8.1 R9.2 R9.3 U1.2 | length 59.4
  Top Layer w0.165: A3.S 42.926,80.453 ; U1.2 40.716,87.503 42.291,87.503 42.926,86.868 ; R9.2 43.136,76.962 ; R9.3 43.136,76.962 ; C3.1 48.476,86.868 42.926,86.868 ; R8.1 60.706,83.312 57.847,80.453 43.136,80.453 ; 42.926,80.453 43.136,80.453 ; 42.926,80.453 42.926,86.868 ; 43.136,76.962 43.136,80.453
NetIC1_3: IC1.3 R2.2 | length 4.9
  Top Layer w0.165: R2.2 49.643,93.839 50.296,94.492 IC1.3
NetIC1_7: IC1.7 R7.2 | length 2.5
  Top Layer w0.165: IC1.7 54.86,90.795 R7.2
NetL1_2: L1.2 R3.1 | length 1.7
  Top Layer w0.165: R3.1 L1.2
OUT: A2.S IC1.11 R8.2 | length 16.4
  Top Layer w0.165: IC1.11 60.706,94.992 ; R8.2 60.706,94.992 ; A2.S 67.306,94.992 60.706,94.992
OUTA: C3.2 R5.1 U1.6 | length 10.6
  Top Layer w0.165: U1.6 47.117,86.233 48.006,85.344 49.904,85.344 50,85.44 50,88.08 49.904,88.176 C3.2 48.768,90.396 R5.1
R_IN_C: C1.1 R1.2 | length 3.9
  Top Layer w0.165: R1.2@42.306,94.996 C1.1
pads on no net: IC1.9 IC1.13 IC1.16 U1.1 U1.5 U1.8

## Polygon pours and split planes (outlines as drawn)
GND on Mid Layer 1 (split plane): 69.848,71.884 25.91,71.884 25.91,103.63 69.848,103.63
GND on Mid Layer 2 (split plane): 69.848,71.884 25.91,71.884 25.91,103.63 69.848,103.63